# Altium PCB CM5IO_IARC.PcbDoc (part 2 of 2)
Units mm, origin at the board's own origin, x right, y up, seen from the top; angles counter-clockwise.
Board outline 70.16 x 60.25 mm, 4 copper layers (Top Layer 1, Top Layer, Bottom Layer, Bottom Layer 1), stack 1.546 mm thick; 55 components, 163 nets, 374 pads, 88 vias.
Unrouted connection lines stored in the file: 69.
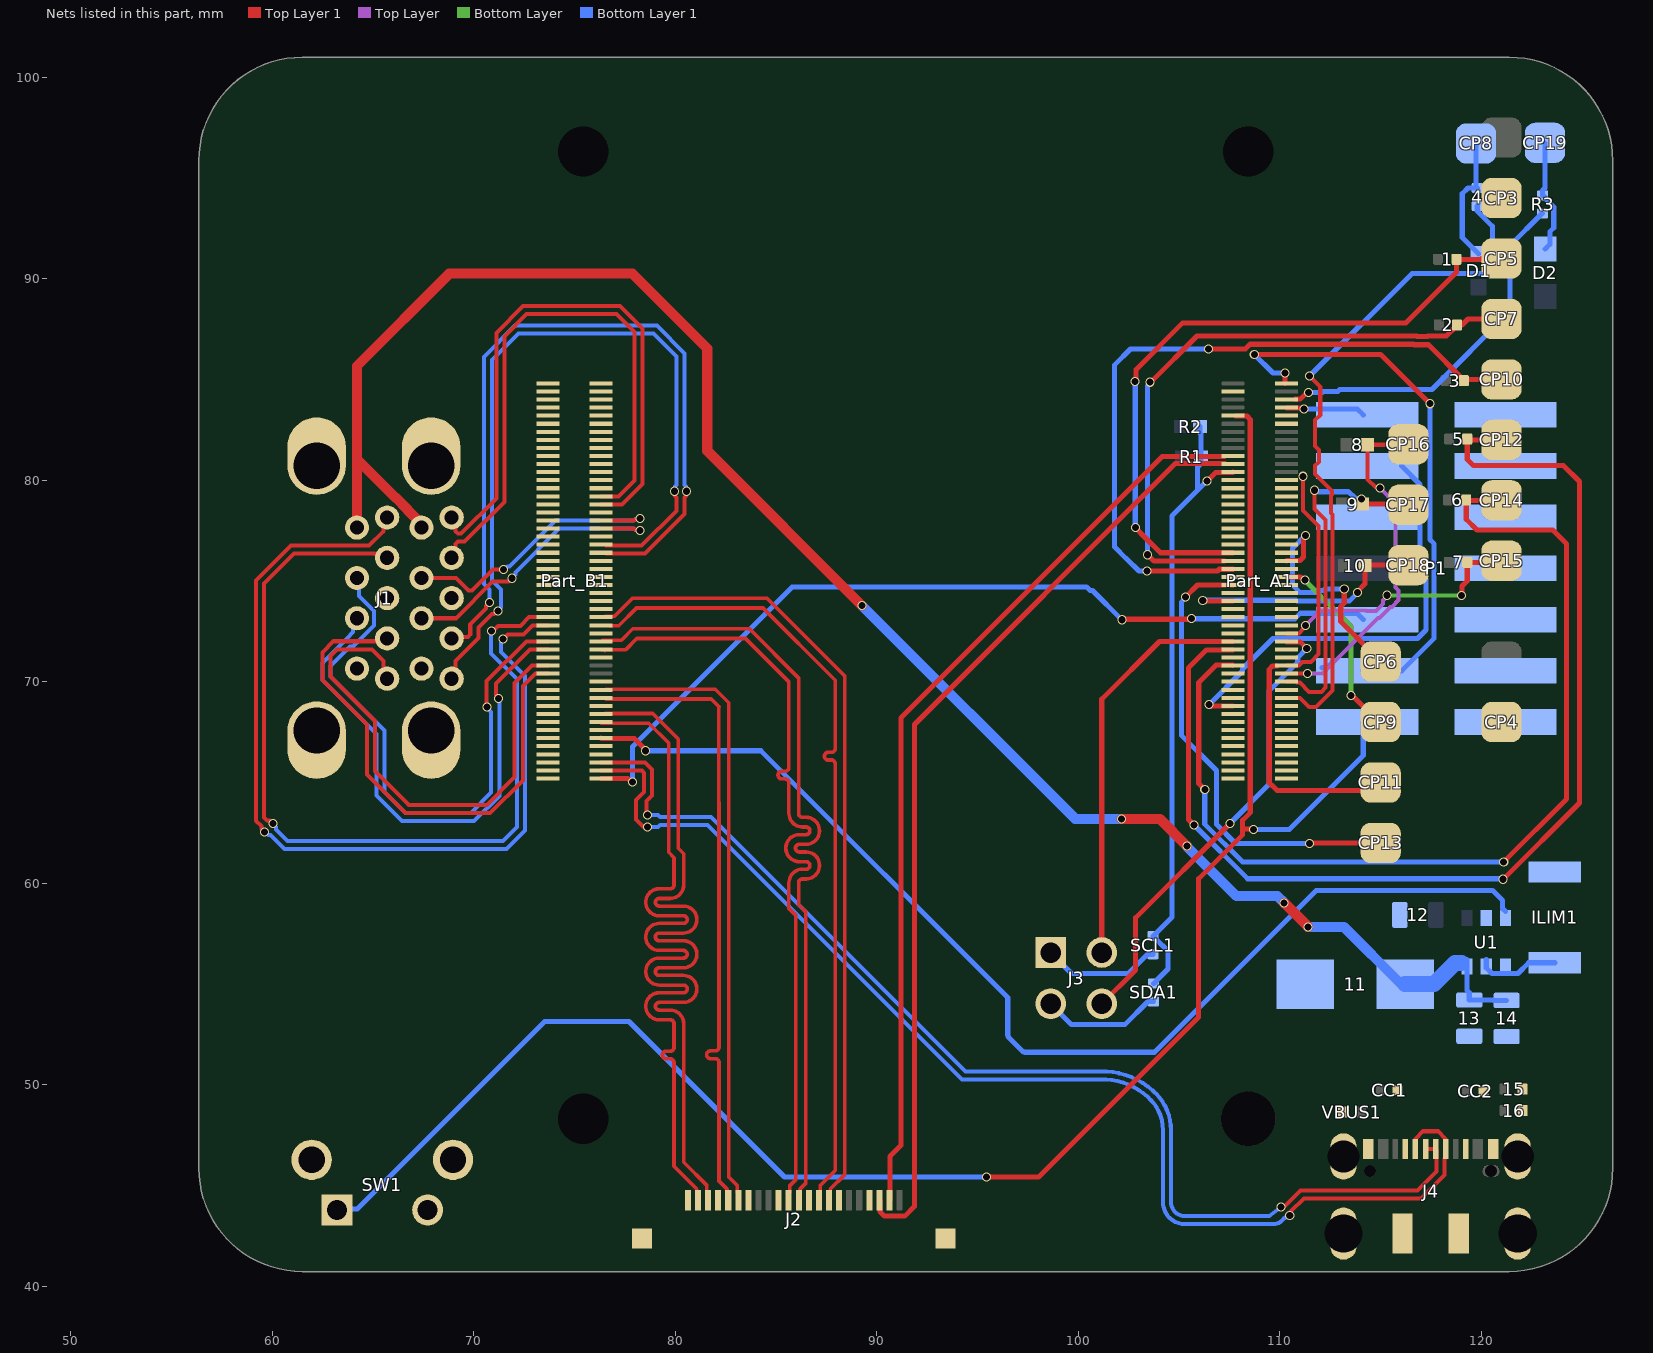
[diagram p4: the nets of this part, all layers, seen from the top]

## Via types
v1: diameter 0.45, hole 0.35, Top Layer 1 to Bottom Layer 1, 88 vias

## Nets (pads, with @x,y where several pads share a name; then routed paths per layer and width w, separated by ;. In a path a pad name is that pad's centre, name@x,y a point inside that pad or via, vN(x,y) a via of type N, cw(c..) or ccw(c..) an arc to the next point about the centre after c; other vN are vias at no path point) (continued)
DPHY0_D0_3_N: J2.2 Part_B1.15 | length 40.1
  Top Layer 1 w0.18: Part_B1.15@76.32,68 76.302,67.982 76.341,67.942 76.739,67.942 78.683,67.942 79.671,66.955 79.671,61.535 79.938,61.268 79.938,59.916 cw(c79.748,59.916) 79.748,59.726 79.204,59.726 ccw(c79.204,59.056) 79.204,58.386 80.402,58.386 cw(c80.402,58.196) 80.402,58.006 79.204,58.006 ccw(c79.204,57.336) 79.204,56.666 80.402,56.666 cw(c80.402,56.476) 80.402,56.286 79.204,56.286 ccw(c79.204,55.616) 79.204,54.946 80.402,54.946 cw(c80.402,54.756) 80.402,54.566 79.204,54.566 ccw(c79.204,53.896) 79.204,53.226 79.748,53.226 cw(c79.748,53.036) 79.938,53.036 79.938,52.706 79.938,52.345 79.938,51.856 cw(c79.748,51.856) 79.748,51.666 79.552,51.666 ccw(c79.552,51.476) 79.552,51.286 79.748,51.286 cw(c79.748,51.096) 79.938,51.096 79.938,51.006 79.938,45.955 81.069,44.824 81.069,44.332 J2.2@81.129,44.272
DPHY0_D0_3_P: J2.3 Part_B1.17 | length 39.8
  Top Layer 1 w0.18: Part_B1.17@76.54,68.422 77.189,68.422 78.882,68.422 80.151,67.153 80.151,61.733 80.418,61.466 80.418,61.268 80.418,59.916 cw(c79.748,59.916) 79.748,59.246 79.204,59.246 ccw(c79.204,59.056) 79.204,58.866 80.402,58.866 cw(c80.402,58.196) 80.402,57.526 79.204,57.526 ccw(c79.204,57.336) 79.204,57.146 80.402,57.146 cw(c80.402,56.476) 80.402,55.806 79.204,55.806 ccw(c79.204,55.616) 79.204,55.426 80.402,55.426 cw(c80.402,54.756) 80.402,54.086 79.204,54.086 ccw(c79.204,53.896) 79.204,53.706 79.748,53.706 cw(c79.748,53.036) 80.418,53.036 80.418,52.706 80.418,46.154 81.569,45.003 81.569,44.682 81.629,44.622 J2.3@81.629,44.272
DPHY0_D1_3_N: J2.5 Part_B1.21 | length 31.4
  Top Layer 1 w0.18: Part_B1.21@76.565,69.142 81.785,69.142 82.169,68.758 ; 82.153,68.774 82.169,59.366 82.169,52.314 82.169,51.87 cw(c81.979,51.87) 81.979,51.68 81.744,51.68 ccw(c81.744,51.49) 81.744,51.3 81.979,51.3 cw(c81.979,51.11) 82.169,51.11 82.169,51.02 82.169,45.224 82.569,44.824 82.569,44.332 J2.5@82.629,44.272
DPHY0_D1_3_P: J2.6 Part_B1.23 | length 31.2
  Top Layer 1 w0.18: Part_B1.23@76.565,69.622 81.984,69.622 82.649,68.957 82.649,68.774 82.649,59.366 82.649,45.423 83.069,45.003 83.069,44.682 83.129,44.622 J2.6@83.129,44.272
DPHY0_D2_3_N: J2.11 Part_B1.33 | length 40.2
  Top Layer 1 w0.18: Part_B1.33@76.32,71.578 76.481,71.578 76.529,71.53 76.577,71.578 77.526,71.578 78.091,72.143 83.483,72.143 85.639,69.987 85.639,66.626 85.639,65.747 cw(c85.449,65.747) 85.449,65.557 85.289,65.557 ccw(c85.289,65.367) 85.289,65.177 85.449,65.177 cw(c85.449,64.987) 85.639,64.987 85.639,64.897 85.639,64.402 85.639,63.464 ccw(c86.309,63.464) 86.309,62.794 86.488,62.794 cw(c86.488,62.604) 86.678,62.604 cw(c86.488,62.604) 86.488,62.414 86.155,62.414 ccw(c86.155,61.744) 85.485,61.744 ccw(c86.155,61.744) 86.155,61.074 86.488,61.074 cw(c86.488,60.884) 86.678,60.884 cw(c86.488,60.884) 86.488,60.694 86.309,60.694 ccw(c86.309,60.024) 85.639,60.024 85.639,58.834 85.639,58.746 85.986,58.398 85.986,45.301 85.689,45.003 85.689,44.682 85.629,44.622 J2.11@85.629,44.272
DPHY0_D2_3_P: J2.12 Part_B1.35 | length 40.2
  Top Layer 1 w0.18: Part_B1.35@76.33,72.01 76.378,72.058 77.327,72.058 77.892,72.623 83.681,72.623 86.119,70.186 86.119,64.402 86.119,63.464 ccw(c86.309,63.464) 86.309,63.274 86.488,63.274 cw(c86.488,62.604) 87.158,62.604 cw(c86.488,62.604) 86.488,61.934 86.155,61.934 ccw(c86.155,61.744) 85.965,61.744 ccw(c86.155,61.744) 86.155,61.554 86.488,61.554 cw(c86.488,60.884) 87.158,60.884 cw(c86.488,60.884) 86.488,60.214 86.309,60.214 ccw(c86.309,60.024) 86.119,60.024 86.119,58.944 86.229,58.834 86.466,58.597 86.466,45.102 86.189,44.824 86.189,44.332 J2.12@86.129,44.272
DPHY0_D3_3_N: J2.14 Part_B1.39 | length 39.9
  Top Layer 1 w0.18: Part_B1.39@76.754,72.778 77.189,72.778 78.072,73.661 84.353,73.661 87.937,70.076 87.937,67.156 87.937,66.686 cw(c87.747,66.686) 87.747,66.496 87.587,66.496 ccw(c87.587,66.306) 87.587,66.116 87.747,66.116 cw(c87.747,65.926) 87.937,65.926 87.937,65.479 87.937,45.752 87.189,45.003 87.189,44.682 87.129,44.622 J2.14@87.129,44.272
DPHY0_D3_3_P: J2.15 Part_B1.41 | length 40.4
  Top Layer 1 w0.18: Part_B1.41@76.32,73.2 76.33,73.21 76.507,73.21 76.555,73.258 76.99,73.258 77.873,74.141 84.552,74.141 88.417,70.275 88.417,45.553 87.689,44.824 87.689,44.332 J2.15@87.629,44.272
EEPROM_nWP_2: P1.4 Part_A1.20 | length 22.2
  Top Layer 1 w0.254: v1(106.477,68.859) 106.53,68.859 106.589,68.8 Part_A1.20@107.68,68.8
  Bottom Layer 1 w0.254: v1(106.477,68.859) 108.144,70.526 108.144,70.628 109.662,72.146 116.825,72.146 117.251,72.572 117.251,75.129 116.959,75.421 116.959,79.789 P1.4@116.045,80.703
GND: 11.2 12.2 13.2 14.2 15.1 16.1 CC1.2 CC2.2 CP3.1 CP4.1 ILIM1.2 J1.A4 J1.A7 J1.B4 J1.B7 J1.Shell J2.1 J2.4 J2.7 J2.10 J2.13 J2.16 J2.19 J4.A1/B12 J4.A12/B1 P1.1 P1.3 P1.5 P1.7 P1.9 P1.11 P1.13 Part_A1.1 Part_A1.2 Part_A1.7 Part_A1.8 Part_A1.13 Part_A1.14 Part_A1.22 Part_A1.23 Part_A1.32 Part_A1.33 Part_A1.42 Part_A1.43 Part_A1.52 Part_A1.53 Part_A1.59 Part_A1.60 Part_A1.65 Part_A1.66 Part_A1.71 Part_A1.74 Part_A1.98 Part_B1.7 Part_B1.8 Part_B1.13 Part_B1.14 Part_B1.19 Part_B1.20 Part_B1.25 Part_B1.26 Part_B1.31 Part_B1.32 Part_B1.37 Part_B1.38 Part_B1.44 Part_B1.50 Part_B1.55 Part_B1.56 Part_B1.61 Part_B1.62 Part_B1.67 Part_B1.68 Part_B1.73 Part_B1.74 Part_B1.79 Part_B1.80 Part_B1.85 Part_B1.86 Part_B1.91 Part_B1.92 Part_B1.97 Part_B1.98 SW1.2 U1.2 VBUS1.2
GPIO2_2: 1.1 CP5.1 Part_A1.58 | length 34
  Top Layer 1 w0.254: v1(102.819,84.887) 102.857,84.924 102.857,85.483 105.181,87.808 116.252,87.808 118.756,90.312 1.1@118.756,90.932 ; v1(102.83,77.643) 103.314,77.16 104.074,76.4 Part_A1.58@107.68,76.4 ; 1.1@118.756,90.957 119.957,90.957 120,91 CP5.1@121,91
  Bottom Layer 1 w0.254: v1(102.819,84.887) 102.825,84.881 102.825,77.649 v1(102.83,77.643)
GPIO3_2: 2.1 CP7.1 Part_A1.56 | length 31.3
  Top Layer 1 w0.254: v1(103.429,76.302) 103.745,75.985 Part_A1.56@107.237,75.985 ; v1(103.556,84.861) 103.597,84.861 105.888,87.152 116.791,87.152 116.818,87.126 117.32,87.126 117.346,87.152 118.26,87.152 118.789,87.681 2.1@118.789,87.706 119.039,87.706 119.332,88 CP7.1@121,88
  Bottom Layer 1 w0.254: v1(103.429,76.302) 103.429,84.681 103.556,84.808 v1(103.556,84.861)
GPIO4_2: 3.1 CP10.1 Part_A1.54 | length 35.8
  Top Layer 1 w0.254: v1(103.403,75.489) 106.904,75.489 106.994,75.579 Part_A1.54@107.659,75.579 ; v1(106.451,86.512) 108.287,86.512 108.521,86.746 116.623,86.746 116.649,86.72 117.372,86.72 119.092,85 CP10.1@121,85
  Bottom Layer 1 w0.254: v1(103.403,75.489) 103.005,75.489 102.39,76.104 102.381,76.104 101.803,76.683 101.803,85.725 102.591,86.512 v1(106.451,86.512)
GPIO5_2: 5.1 CP12.1 Part_A1.34 | length 57
  Top Layer 1 w0.254: v1(105.74,62.89) 105.461,63.17 105.461,70.688 106.352,71.579 Part_A1.34@107.68,71.579 ; CP12.1@121,82 119.339,82 5.1@119.297,82.042 119.297,81.033 119.609,80.721 124.079,80.721 124.868,79.932 124.868,63.984 v1(121.082,60.198)
  Bottom Layer 1 w0.254: v1(105.74,62.89) 108.407,60.223 121.056,60.223 v1(121.082,60.198)
GPIO6_2: 6.1 CP14.1 Part_A1.30 | length 50.1
  Top Layer 1 w0.254: v1(106.274,64.643) 105.973,64.944 105.973,69.963 106.831,70.821 107.659,70.821 Part_A1.30@107.68,70.8 ; CP14.1@121,79 119.265,79 6.1@119.246,79.019 119.246,78.061 119.779,77.528 123.54,77.528 124.231,76.836 124.231,64.186 v1(121.107,61.062)
  Bottom Layer 1 w0.254: v1(106.274,64.643) 106.274,62.931 108.143,61.062 v1(121.107,61.062)
GPIO7_2: 7.1 CP15.1 Part_A1.37 | length 13.2
  Top Layer 1 w0.2: Part_A1.37@110.32,72.4 110.946,72.4 111.18,72.634 111.18,72.639 111.267,72.726 v1(111.267,72.793)
  Top Layer 1 w0.254: v1(119.003,74.27) 119.04,74.307 119.04,74.746 119.297,75.003 7.1@119.297,75.921 120.921,75.921 CP15.1@121,76
  Top Layer w0.2: v1(111.267,72.793) 112.005,73.531 114.284,73.531 114.299,73.516 114.779,73.516 115.118,73.855 115.118,74.025 115.317,74.224 v1(115.317,74.291)
  Bottom Layer w0.2: v1(115.317,74.291) 115.328,74.28 118.992,74.28 v1(119.003,74.27)
GPIO14_2: CP6.1 Part_A1.55 | length 12.1
  Top Layer 1 w0.254: Part_A1.55@110.32,76 110.341,76.021 111.006,76.021 111.169,76.184 111.169,77.11 111.267,77.208 v1(111.267,77.261) ; v1(113.195,74.603) 113.195,73.901 113.018,73.724 113.018,72.982 CP6.1@115,71
  Bottom Layer 1 w0.254: v1(111.267,77.261) 110.634,76.628 110.634,74.789 110.989,74.434 111.729,74.434 111.818,74.524 112.16,74.524 112.239,74.603 v1(113.195,74.603)
GPIO15_2: CP9.1 Part_A1.51 | length 9.7
  Top Layer 1 w0.254: Part_A1.51@110.32,75.2 111.027,75.2 111.187,75.04 v1(111.24,75.04) ; v1(113.538,69.317) 113.591,69.317 114.908,68 CP9.1@115,68
  Bottom Layer w0.254: v1(111.24,75.04) 113.538,72.742 v1(113.538,69.317)
GPIO16_2: CP11.1 Part_A1.29 | length 22.9
  Top Layer 1 w0.2: Part_A1.29@110.32,70.8 110.942,70.8 110.99,70.848 110.994,70.848 111.134,70.988 111.535,70.988 111.912,71.364 111.912,77.733 111.142,78.503 111.142,79.258 111.14,79.26 v1@111.14,80.205
  Top Layer 1 w0.254: Part_A1.29@109.877,70.779 109.634,70.779 109.471,70.616 109.471,64.984 109.634,64.821 109.652,64.821 109.862,64.61 114.61,64.61 CP11.1@115,65
  other v1: 111.14,80.194
GPIO17_2: CP13.1 Part_A1.50 | length 23.2
  Top Layer 1 w0.254: v1(105.308,74.193) 105.915,74.8 Part_A1.50@107.68,74.8 ; v1(111.481,61.976) 111.505,62 CP13.1@115,62
  Bottom Layer 1 w0.254: v1(105.308,74.193) 105.308,74.14 105.109,73.941 105.109,67.339 106.854,65.594 106.854,62.925 107.803,61.976 v1(111.481,61.976)
GPIO20_2: 8.1 CP16.1 Part_A1.27 | length 17.6
  Top Layer 1 w0.2: Part_A1.27@110.32,70.4 v1(111.361,70.4) ; v1(114.96,79.604) 114.913,79.651 114.735,79.651 114.343,80.043 8.1@114.343,81.758 116.352,81.758 CP16.1@116.378,81.784
  Top Layer w0.2: v1(111.361,70.4) 112.113,70.4 114.877,73.164 114.933,73.164 115.481,73.712 115.557,73.712 115.896,74.051 115.896,74.531 115.743,74.684 115.743,78.821 v1(114.96,79.604)
GPIO21_2: 9.1 CP17.1 Part_A1.25 | length 17
  Top Layer 1 w0.2: Part_A1.25@110.32,70 110.79,70 110.838,69.952 110.994,69.952 111.448,69.498 112.054,69.498 112.264,69.708 112.264,78.033 111.719,78.578 v1@111.719,79.483
  Top Layer 1 w0.254: 9.1@114.109,78.809 115.352,78.809 115.378,78.784 CP17.1@116.378,78.784
  Bottom Layer 1 w0.254: v1(111.719,79.5) 111.757,79.463 111.895,79.463 111.931,79.427 113.389,79.427 113.46,79.369 113.811,79.077 v1@114.013,79.077
  other v1: 114.04,79.068
GPIO22_2: 10.1 CP18.1 Part_A1.46 | length 13.1
  Top Layer 1 w0.254: v1(106.172,74.041) 106.225,74.041 106.266,74 Part_A1.46@107.68,74 ; v1(113.859,74.436) 113.859,74.49 114.216,74.847 10.1@114.216,75.764 114.237,75.784 CP18.1@116.378,75.784
  Bottom Layer 1 w0.254: v1(106.172,74.041) 110.808,74.041 110.852,73.997 113.446,73.997 113.859,74.41 v1(113.859,74.436)
GPIO_VREF: Part_A1.78 R1.2 R2.2 SCL1.2 SDA1.2 | length 31.4
  Top Layer 1 w0.254: v1(106.375,79.959) 106.393,79.959 106.812,80.379 107.659,80.379 Part_A1.78@107.68,80.4
  Bottom Layer 1 w0.254: SDA1.2@103.73,55.031 103.755,55.031 103.878,55.154 103.878,55.179 104.445,55.746 104.445,56.634 103.852,57.227 103.852,57.252 103.729,57.375 SCL1.2@103.704,57.375 104.648,58.318 104.648,78.232 105.224,78.808 105.912,79.496 ; R2.2@106.035,82.657 106.035,82.332 106.086,82.281 R1.2@106.086,81.158 106.086,80.833 105.912,80.659 105.912,79.496 ; v1(106.375,79.959) 105.912,79.496
ID_SC: J3.4 Part_A1.35 | length 23
  Top Layer 1 w0.254: J3.4@101.164,54.022 102.845,55.702 102.845,58.293 v1(107.522,62.97) ; Part_A1.35@110.32,72 110.341,71.979 111.006,71.979 111.333,71.652 v1(111.333,71.642)
  Bottom Layer 1 w0.254: v1(107.522,62.97) 109.471,64.919 109.471,69.551 110.885,70.965 110.885,71.195 v1(111.333,71.642)
ID_SD: J3.3 Part_A1.36 | length 20.3
  Top Layer 1 w0.254: J3.3@101.164,56.562 101.164,69.135 104.029,72 Part_A1.36@107.68,72
Net4_1: 4.1 Part_A1.21 | length 33.9
  Top Layer 1 w0.2: Part_A1.21@110.32,69.2 110.993,69.2 111.457,68.736 111.79,68.736 112.616,69.562 112.616,78.297 112.532,78.38 112.532,79.239 112.583,79.289 112.583,79.455 111.74,80.298 111.74,80.72 111.933,80.913 111.933,81.508 111.74,81.701 111.74,82.978 112.004,83.242 112.004,84.635 v1(111.475,85.164)
  Bottom Layer 1 w0.254: v1(111.475,85.164) 116.563,90.253 120.086,90.253 120.542,90.708 120.542,92.602 119.791,93.352 4.1@119.791,93.602
Net4_2: 4.2 CP8.1 D1.2 | length 6.4
  Bottom Layer 1 w0.254: CP8.1@119.735,96.707 119.735,94.559 4.2@119.791,94.502 119.334,94.502 119.05,94.218 119.05,92.036 D1.2@119.863,91.224
NetCP19_1: CP19.1 D2.2 R3.2 | length 5.7
  Bottom Layer 1 w0.254: CP19.1@123.158,96.737 123.158,94.503 123.038,94.382 R3.2@123.038,94.132 123.063,94.132 123.186,94.009 123.186,93.967 123.592,93.561 123.592,92.524 123.397,92.329 123.397,91.704 D2.2@123.165,91.472
NetILIM1_1: ILIM1.1 U1.5 | length 4.1
  Bottom Layer 1 w0.254: U1.5@120.242,56.206 120.242,55.806 120.521,55.527 121.818,55.527 122.348,56.057 ILIM1.1@123.648,56.057
NetJ2_MP1: J2.MP1
NetJ2_MP2: J2.MP2
NetJ4_1: J4.1
NetJ4_2: J4.2
NetJ4_3: J4.3
NetJ4_4: J4.4
NetJ4_5: J4.5
NetJ4_6: J4.6
NetJ4_A8: J4.A8
NetJ4_B8: J4.B8
NetP1_6: P1.6
NetPart_A1_3: Part_A1.3
NetPart_A1_4: Part_A1.4
NetPart_A1_5: Part_A1.5
NetPart_A1_6: Part_A1.6
NetPart_A1_9: Part_A1.9
NetPart_A1_10: Part_A1.10
NetPart_A1_11: Part_A1.11
NetPart_A1_12: Part_A1.12
NetPart_A1_15: Part_A1.15
NetPart_A1_16: Part_A1.16
NetPart_A1_17: Part_A1.17
NetPart_A1_18: Part_A1.18
NetPart_A1_19: Part_A1.19
NetPart_A1_24: Part_A1.24
NetPart_A1_26: Part_A1.26
NetPart_A1_28: Part_A1.28
NetPart_A1_31: Part_A1.31
NetPart_A1_38: Part_A1.38
NetPart_A1_39: Part_A1.39
NetPart_A1_40: Part_A1.40
NetPart_A1_41: Part_A1.41
NetPart_A1_44: Part_A1.44
NetPart_A1_45: Part_A1.45
NetPart_A1_47: Part_A1.47
NetPart_A1_48: Part_A1.48
NetPart_A1_49: Part_A1.49
NetPart_A1_57: Part_A1.57
NetPart_A1_61: Part_A1.61
NetPart_A1_62: Part_A1.62
NetPart_A1_63: Part_A1.63
NetPart_A1_64: Part_A1.64
NetPart_A1_67: Part_A1.67
NetPart_A1_68: Part_A1.68
NetPart_A1_69: Part_A1.69
NetPart_A1_70: Part_A1.70
NetPart_A1_72: Part_A1.72
NetPart_A1_73: Part_A1.73
NetPart_A1_75: Part_A1.75
NetPart_A1_76: Part_A1.76
NetPart_A1_89: Part_A1.89
NetPart_A1_91: Part_A1.91
NetPart_B1_102: Part_B1.2
NetPart_B1_104: Part_B1.4
NetPart_B1_106: Part_B1.6
NetPart_B1_109: Part_B1.9
NetPart_B1_110: Part_B1.10
NetPart_B1_112: Part_B1.12
NetPart_B1_116: Part_B1.16
NetPart_B1_118: Part_B1.18
NetPart_B1_122: Part_B1.22
NetPart_B1_124: Part_B1.24
NetPart_B1_143: Part_B1.43
NetPart_B1_145: Part_B1.45
NetPart_B1_146: Part_B1.46
NetPart_B1_147: Part_B1.47
NetPart_B1_148: Part_B1.48
NetPart_B1_149: Part_B1.49
NetPart_B1_151: Part_B1.51
NetPart_B1_152: Part_B1.52
NetPart_B1_153: Part_B1.53
NetPart_B1_154: Part_B1.54
NetPart_B1_158: Part_B1.58
NetPart_B1_160: Part_B1.60
NetPart_B1_164: Part_B1.64
NetPart_B1_166: Part_B1.66
NetPart_B1_170: Part_B1.70
NetPart_B1_172: Part_B1.72
NetPart_B1_175: Part_B1.75
NetPart_B1_176: Part_B1.76
NetPart_B1_177: Part_B1.77
NetPart_B1_178: Part_B1.78
NetPart_B1_181: Part_B1.81
NetPart_B1_182: Part_B1.82
NetPart_B1_183: Part_B1.83
NetPart_B1_184: Part_B1.84
NetPart_B1_187: Part_B1.87
NetPart_B1_188: Part_B1.88
NetPart_B1_189: Part_B1.89
NetPart_B1_190: Part_B1.90
NetPart_B1_193: Part_B1.93
NetPart_B1_194: Part_B1.94
NetPart_B1_195: Part_B1.95
NetPart_B1_196: Part_B1.96
NetPart_B1_199: Part_B1.99
NetPart_B1_200: Part_B1.100
NetSW1_3: SW1.3
NetSW1_4: SW1.4
NetU1_4: U1.4
nPWR_LED_2: Part_A1.95 R3.1 | length 18
  Top Layer 1 w0.254: Part_A1.95@110.763,84.021 111.006,84.021 111.304,84.319 111.388,84.319 v1(111.425,84.357)
  Bottom Layer 1 w0.254: v1(111.425,84.357) 112.108,84.357 112.158,84.407 112.874,84.407 112.973,84.506 117.551,84.506 121.412,88.367 121.412,91.632 123.013,93.232 R3.1@123.038,93.232
nRPIBOOT_2: P1.2 Part_A1.93 | length 3.9
  Top Layer 1 w0.254: Part_A1.93@110.341,83.579 111.086,83.579 111.139,83.526 v1(111.192,83.526)
  Bottom Layer 1 w0.254: v1(111.192,83.526) 113.857,83.526 P1.2@114.14,83.243
PMIC_ENABLE_2: P1.12 Part_A1.99 | length 28.8
  Top Layer 1 w0.254: v1(108.73,86.242) 115.002,86.242 v1(117.45,83.795) ; Part_A1.99@110.261,84.806 v1(110.261,85.319)
  Bottom Layer 1 w0.254: v1(108.73,86.242) 109.653,85.319 v1(110.261,85.319) ; P1.12@112.086,70.692 112.337,70.692 P1.12@112.696,71.051 ; P1.12@114.14,70.543 116.045,70.543 117.657,72.155 117.657,76.843 117.45,77.05 v1(117.45,83.795)
PWR_BUT_2: P1.14 Part_A1.92 SW1.1 | length 93.8
  Top Layer 1 w0.254: v1(95.453,45.415) 98.019,45.415 105.969,53.365 105.969,60.223 108.153,62.408 108.153,62.767 ; Part_A1.92@107.81,83.179 108.366,83.179 108.529,83.016 108.529,63.502 108.153,63.126 108.153,62.767 ; v1(108.687,62.662) 108.649,62.699 108.221,62.699 108.153,62.767
  Bottom Layer 1 w0.254: SW1.1@63.215,43.789 63.257,43.831 64.217,43.831 73.52,53.134 77.704,53.134 85.419,45.419 95.45,45.419 v1(95.453,45.415) ; v1(108.687,62.662) 110.465,62.662 114.14,66.337 P1.14@114.14,68.003
SCL0: J2.20 Part_A1.80 | length 47.3
  Top Layer 1 w0.254: J2.20@90.129,44.272 90.152,44.249 90.152,43.705 90.375,43.481 91.382,43.481 91.868,43.967 91.868,67.879 104.812,80.823 Part_A1.80@107.282,80.823
SCL1_3: J3.1 SCL1.1 | length 5.9
  Bottom Layer 1 w0.254: J3.1@98.624,56.562 99.663,55.523 102.477,55.523 103.429,56.475 SCL1.1@103.704,56.475
SDA0: J2.21 Part_A1.82 | length 45.6
  Top Layer 1 w0.254: J2.21@90.629,44.272 90.652,44.295 90.652,46.449 91.191,46.989 91.191,68.204 104.166,81.179 Part_A1.82@107.237,81.179
SDA1_3: J3.2 SDA1.1 | length 6
  Bottom Layer 1 w0.254: J3.2@98.624,54.022 99.663,52.983 102.307,52.983 103.455,54.131 SDA1.1@103.73,54.131
USB2_1_N: J4.A7 J4.B7 Part_B1.3 | length 60.4
  Top Layer 1 w0.2: Part_B1.3@76.32,65.6 78.123,65.6 78.126,65.596 78.339,65.596 78.456,65.479 78.456,64.529 78.05,64.123 78.05,63.157 78.389,62.817 78.606,62.817 v1(78.629,62.794) ; v1(110.49,43.51) 110.538,43.558 110.538,43.701 111.192,44.355 117.004,44.355 118.178,45.529 118.178,46.335 118.193,46.35 118.193,46.785 J4.A7@118.228,46.82 ; J4.B7@116.728,46.82 116.728,47.32 117.103,47.695 117.853,47.695 118.228,47.32
  Bottom Layer 1 w0.2: v1(78.629,62.794) 78.63,62.795 79.154,62.795 79.254,62.895 81.602,62.895 94.231,50.267 101.181,50.267 101.344,50.263 101.375,50.262 cw(c101.368,50.062) 101.379,50.262 cw(c101.183,46.896) 103.424,49.414 cw(c103.291,49.265) 103.427,49.411 103.45,49.391 103.567,49.278 cw(c102.044,47.757) 104.197,47.76 104.197,47.752 104.197,44.368 104.197,44.207 104.197,44.205 ; 104.197,44.204 ccw(c105.371,44.204) 104.477,43.443 ccw(c104.933,43.833) 104.518,43.4 ccw(c105.308,44.232) 105.308,43.085 ccw(c105.308,44.232) 105.31,43.085 109.673,43.085 ccw(c109.673,43.685) 110.098,43.261 110.197,43.36 110.199,43.362 ; 110.2,43.363 cw(c110.341,43.221) 110.257,43.403 v1(110.49,43.51)
USB2_1_P: J4.A6 J4.B6 Part_B1.5 | length 57.5
  Top Layer 1 w0.2: Part_B1.5@76.32,66 78.288,66 78.292,65.996 78.504,65.996 78.856,65.645 78.856,64.363 78.581,64.088 78.581,63.444 v1(78.629,63.396) ; v1(110.064,43.936) 110.112,43.984 110.255,43.984 111.026,44.755 116.838,44.755 117.778,45.695 117.778,46.335 117.763,46.35 117.763,46.785 J4.B6@117.728,46.82 J4.A6@117.228,46.82
  Bottom Layer 1 w0.2: v1(78.629,63.396) 78.63,63.395 79.154,63.395 79.254,63.295 81.768,63.295 94.396,50.667 101.18,50.667 101.186,50.667 cw(c101.183,46.896) 101.353,50.663 101.388,50.662 cw(c101.368,50.062) 101.402,50.661 cw(c101.183,46.896) 103.691,49.713 cw(c103.291,49.265) 103.701,49.704 103.723,49.683 cw(c101.183,46.896) 103.849,49.562 ; 103.85,49.561 cw(c102.044,47.757) 104.597,47.758 ; 104.597,44.203 ccw(c105.371,44.204) 104.781,43.703 ccw(c104.933,43.833) 104.794,43.689 ccw(c105.308,44.232) 105.307,43.485 cw(c105.309,42.885) 105.31,43.485 109.472,43.485 v1(110.064,43.936) ; 104.597,44.204 104.597,44.207 104.597,47.755 ccw(c104.197,47.755) 104.597,47.757
USB3-0-D_3_N: J1.A2 Part_B1.36 | length 28.7
  Top Layer 1 w0.2: v1(70.649,68.739) 70.643,68.745 70.643,68.924 70.643,70.027 72.616,72 Part_B1.36@73.68,72
  Bottom Layer 1 w0.2: J1.A2@64.204,75.149 64.309,75.044 64.309,74.249 65.056,73.502 65.056,72.796 64.003,71.744 63.866,71.744 62.894,70.772 62.894,70.258 65.583,67.57 65.583,64.517 66.609,63.491 69.857,63.491 70.866,64.5 70.866,68.496 70.649,68.713 v1(70.649,68.739)
USB3-0-D_3_P: J1.A3 Part_B1.34 | length 26.7
  Top Layer 1 w0.2: v1(71.222,69.164) 71.222,69.232 71.105,69.349 71.105,69.923 72.782,71.6 Part_B1.34@73.68,71.6
  Bottom Layer 1 w0.2: J1.A3@64.204,73.149 64.019,72.964 64.019,72.462 63.7,72.144 62.494,70.938 62.494,70.093 65.183,67.404 65.183,64.351 66.443,63.091 70.023,63.091 71.266,64.334 71.266,68.662 71.266,69.12 v1(71.222,69.164)
USB3-0-RX_3_N: J1.A6 Part_B1.28 | length 25.8
  Top Layer 1 w0.2: J1.A6@65.704,72.149 65.564,72.009 63.052,72.009 62.494,71.451 62.494,70.093 64.708,67.88 64.708,65.392 66.609,63.491 70.815,63.491 72.432,65.108 72.432,69.778 73.054,70.4 Part_B1.28@73.68,70.4
USB3-0-RX_3_P: J1.A5 Part_B1.30 | length 25.5
  Top Layer 1 w0.2: J1.A5@65.704,70.149 65.514,70.339 65.514,71.037 64.942,71.609 63.218,71.609 62.894,71.286 62.894,70.258 65.108,68.045 65.108,65.558 66.775,63.891 70.649,63.891 72.032,65.274 72.032,69.944 72.888,70.8 Part_B1.30@73.68,70.8
USB3-0-TX_3_N: J1.A9 Part_B1.40 | length 46.9
  Top Layer 1 w0.2: v1(59.62,62.541) 59.62,62.573 59.467,62.727 59.467,62.837 59.203,63.101 59.203,75.034 60.921,76.752 64.8,76.752 65.514,77.466 65.514,77.959 J1.A9@65.704,78.149 ; v1(71.445,72.117) 71.452,72.117 71.687,72.352 72.47,72.352 72.918,72.8 Part_B1.40@73.68,72.8
  Bottom Layer 1 w0.2: v1(59.62,62.541) 59.652,62.541 59.806,62.388 59.916,62.388 60.601,61.703 71.616,61.703 72.536,62.623 72.536,70.296 71.35,71.482 71.35,71.954 71.445,72.049 v1(71.445,72.117)
USB3-0-TX_3_P: J1.A8 Part_B1.42 | length 45.1
  Top Layer 1 w0.2: v1(60.046,62.967) 60.013,62.967 59.86,63.12 59.749,63.12 59.603,63.266 59.603,74.868 61.087,76.352 65.087,76.352 65.099,76.341 65.513,76.341 J1.A8@65.704,76.149 ; v1(70.886,72.522) 70.954,72.522 71.127,72.695 71.137,72.695 71.216,72.774 72.326,72.774 72.753,73.2 Part_B1.42@73.68,73.2
  Bottom Layer 1 w0.2: v1(60.046,62.967) 60.046,62.934 60.199,62.781 60.199,62.67 60.766,62.103 71.45,62.103 72.136,62.789 72.136,70.13 70.866,71.4 70.866,72.502 v1(70.886,72.522)
USB3-1-D_3_N: J1.B2 Part_B1.65 | length 14.6
  Top Layer 1 w0.2: J1.B2@67.404,75.149 69.109,75.149 69.743,74.515 69.909,74.515 70.953,75.559 v1(71.482,75.559) ; Part_B1.65@76.32,78 77.94,78 78.018,78.078 78.234,78.078 v1(78.257,78.101)
  Bottom Layer 1 w0.2: v1(71.482,75.559) 71.514,75.559 71.668,75.712 71.778,75.712 74.066,78 77.94,78 78.018,78.078 78.234,78.078 v1(78.257,78.101)
USB3-1-D_3_P: J1.B3 Part_B1.63 | length 14.8
  Top Layer 1 w0.2: J1.B3@67.404,73.149 69.111,73.149 70.941,74.98 71.722,74.98 71.875,75.133 v1(71.907,75.133) ; Part_B1.63@76.32,77.6 77.94,77.6 78.018,77.522 78.234,77.522 v1(78.257,77.499)
  Bottom Layer 1 w0.2: v1(71.907,75.133) 71.907,75.166 72.061,75.319 72.061,75.429 74.231,77.6 77.94,77.6 78.018,77.522 78.234,77.522 v1(78.257,77.499)
USB3-1-RX_3_N: J1.B6 Part_B1.57 | length 39.2
  Top Layer 1 w0.2: J1.B6@68.904,72.149 68.973,72.218 69.709,72.218 69.826,72.335 69.826,72.846 70.618,73.639 70.618,73.746 70.772,73.9 v1(70.772,73.932) ; Part_B1.57@76.565,76.352 78.495,76.352 80.46,78.317 80.46,79.133 80.538,79.211 80.538,79.428 v1(80.561,79.451)
  Bottom Layer 1 w0.2: v1(70.772,73.932) 70.777,73.938 70.777,74.578 70.503,74.853 70.503,86.124 72.05,87.671 79.087,87.671 80.46,86.298 80.46,79.769 80.538,79.691 80.538,79.474 v1(80.561,79.451)
USB3-1-RX_3_P: J1.B5 Part_B1.59 | length 39.2
  Top Layer 1 w0.2: J1.B5@68.904,70.149 69.096,70.341 69.096,71.039 70.226,72.169 70.226,72.681 70.899,73.353 71.011,73.353 71.165,73.507 v1(71.197,73.507) ; Part_B1.59@76.565,76.752 78.329,76.752 80.06,78.483 80.06,79.133 79.982,79.211 79.982,79.428 v1(79.959,79.451)
  Bottom Layer 1 w0.2: v1(71.197,73.507) 71.197,73.539 71.351,73.692 71.351,74.571 70.903,75.018 70.903,85.958 72.216,87.271 78.921,87.271 80.06,86.132 80.06,79.769 79.982,79.691 79.982,79.474 v1(79.959,79.451)
USB3-1-TX_3_N: J1.B9 Part_B1.69 | length 30.2
  Top Layer 1 w0.2: J1.B9@68.904,78.149 69.094,77.959 69.094,77.466 69.211,77.349 69.377,77.349 71.117,79.09 71.117,87.304 72.453,88.64 77.255,88.64 78.378,87.516 78.378,79.822 77.356,78.8 Part_B1.69@76.32,78.8
USB3-1-TX_3_P: J1.B8 Part_B1.71 | length 28.9
  Top Layer 1 w0.2: J1.B8@68.904,76.149 69.094,76.339 69.094,76.832 69.211,76.949 69.543,76.949 71.517,78.924 71.517,87.138 72.619,88.24 77.089,88.24 77.978,87.351 77.978,79.988 77.19,79.2 Part_B1.71@76.32,79.2
USBOTG_ID: P1.10 Part_B1.1 | length 43.9
  Top Layer 1 w0.254: Part_B1.1@76.32,65.2 77.645,65.2 77.824,65.021 v1(77.877,65.021) ; v1(102.159,73.076) 102.184,73.101 105.588,73.101 v1(105.613,73.127)
  Bottom Layer 1 w0.254: v1(77.877,65.021) 77.877,66.777 85.801,74.701 100.413,74.701 100.587,74.527 100.707,74.527 v1(102.159,73.076) ; v1(105.613,73.127) 110.743,73.127 111.016,73.399 113.823,73.399 P1.10@114.14,73.083
VBUS_3: 11.1 13.1 14.1 J1.A1 J1.B1 U1.6 | length 91.3
  Top Layer 1 w0.5: J1.A1@64.204,77.649 64.204,80.989 ; 64.204,82.549 64.204,81.039 64.229,81.014 66.092,79.151 66.119,79.151 66.706,78.564 66.706,78.537 67.404,77.839 J1.B1@67.404,77.649 ; 64.204,82.599 64.204,85.667 68.783,90.246 77.876,90.246 81.585,86.538 81.585,81.458 v1(89.256,73.787) ; v1(102.133,63.195) 104.038,63.195 v1(105.385,61.849) ; v1(110.211,59.03) v1(111.404,57.836)
  Bottom Layer 1 w0.254: 11.1@116.015,54.995 11.1@116.215,54.995 ; U1.6@119.292,56.206 119.292,54.69 119.4,54.583 13.1@119.4,54.203 120.588,54.203 120.602,54.189 14.1@121.252,54.189
  Bottom Layer 1 w0.5: v1(89.256,73.787) 99.847,63.195 v1(102.133,63.195) ; v1(105.385,61.849) 105.385,61.824 107.848,59.36 109.88,59.36 v1(110.211,59.03) ; v1(111.404,57.836) 113.175,57.836 11.1@116.015,54.995
  Bottom Layer 1 w0.8: 11.1@116.215,54.995 117.64,54.995 118.681,56.036 119.017,56.036
VBUS_EN_3: Part_B1.11 U1.3 | length 56.4
  Top Layer 1 w0.254: Part_B1.11@76.32,67.2 76.341,67.179 77.967,67.179 78.532,66.614 v1(78.532,66.575)
  Bottom Layer 1 w0.254: v1(78.532,66.575) 84.245,66.575 96.495,54.325 96.495,52.505 ccw(c96.749,52.505) 96.545,52.353 ccw(c96.749,52.505) 96.568,52.326 97.208,51.687 ccw(c97.387,51.867) 97.235,51.664 ccw(c97.387,51.867) 97.387,51.613 103.781,51.613 111.807,59.639 120.559,59.639 121.044,59.154 121.044,58.754 U1.3@121.192,58.606
pads on no net: J4.

## Polygon pours and split planes (outlines as drawn)
GND on Bottom Layer "GND_L03_P005" (solid, remove dead copper, pour order 5): 59.639,40.615 59.639,101.295 125.984,101.295 125.984,40.615
GND on Bottom Layer "GND_L03_P000" (solid, remove dead copper, pour order 0): 59.639,40.615 59.639,101.295 125.984,101.295 125.984,40.615
GND on Top Layer "GND_L02_P004" (solid, remove dead copper, pour order 4): 59.639,40.615 59.639,101.295 125.984,101.295 125.984,40.615
GND on Bottom Layer 1 "GND_L04_P007" (solid, remove dead copper, pour order 7): 56.769,40.615 56.769,101.295 125.984,101.295 125.984,40.615

## Other copper
Multi-Layer:
  pour cut-out: 80.24,101.018 80.24,88.821 104.497,88.821 104.497,101.018
  lines w0.254: 56.488,45.86 ccw(c61.488,45.86) 61.488,40.86 121.39,40.86 ccw(c121.39,45.86) 126.39,45.86 126.39,95.86 ccw(c121.39,95.86) 121.39,100.86 61.488,100.86 ccw(c61.488,95.86) 56.488,95.86 56.488,45.86

## Silkscreen, mask and mechanical layers (free items; w line width, h text height)
Top Overlay:
  lines w0.254: 71.938,48.311 ccw(c75.438,48.311) 75.438,44.811 108.438,44.811 ccw(c108.438,48.311) 111.938,48.311 111.938,96.311 ccw(c108.438,96.311) 108.438,99.811 75.438,99.811 ccw(c75.438,96.311) 71.938,96.311 71.938,48.311